# EAGLE board Analog_Scaling_Circuit_Manual (EAGLE 9.3.0)
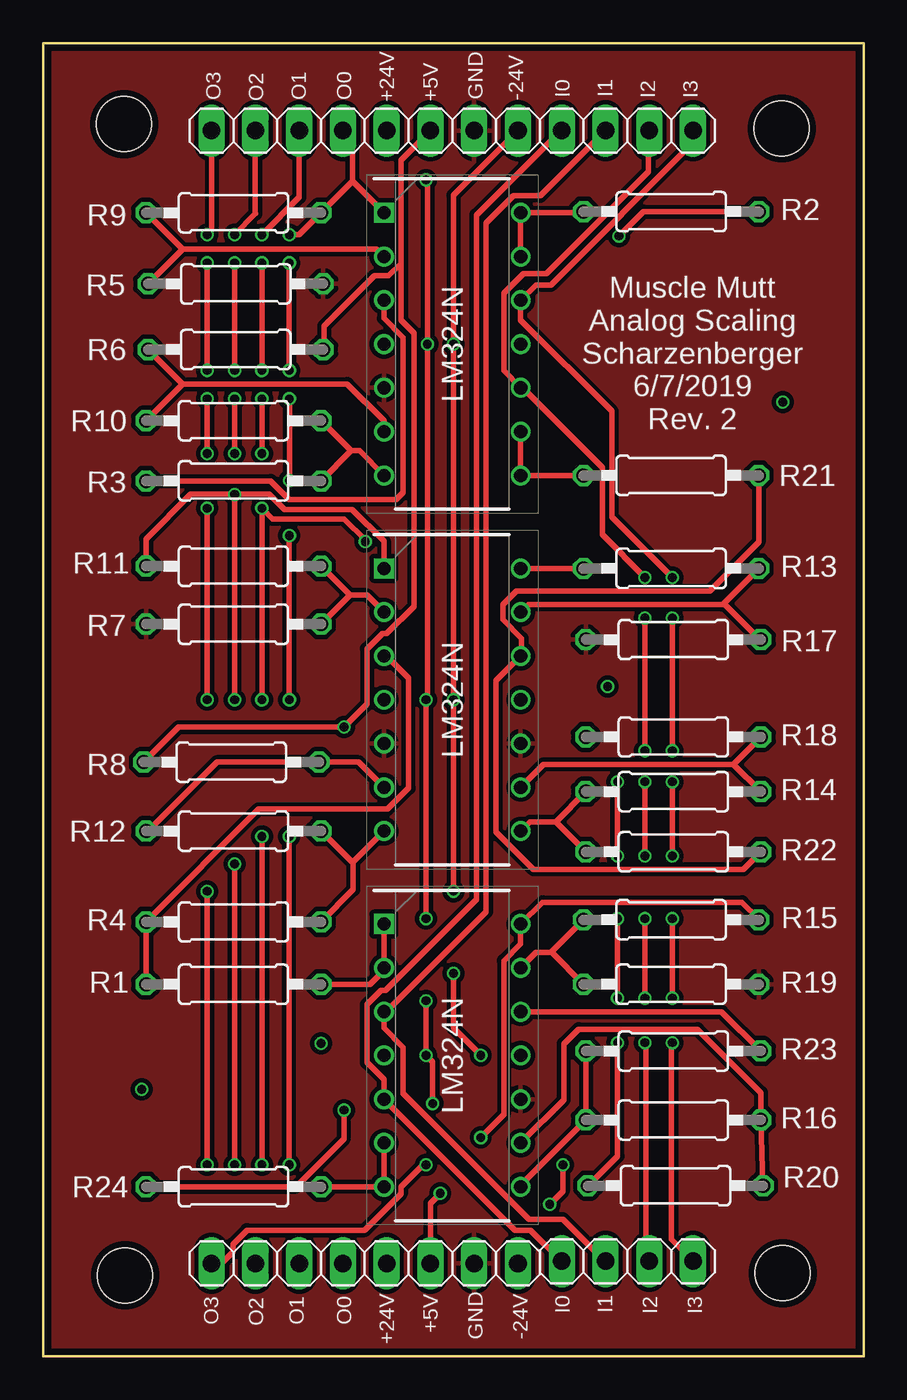
[diagram p0: board, top side]
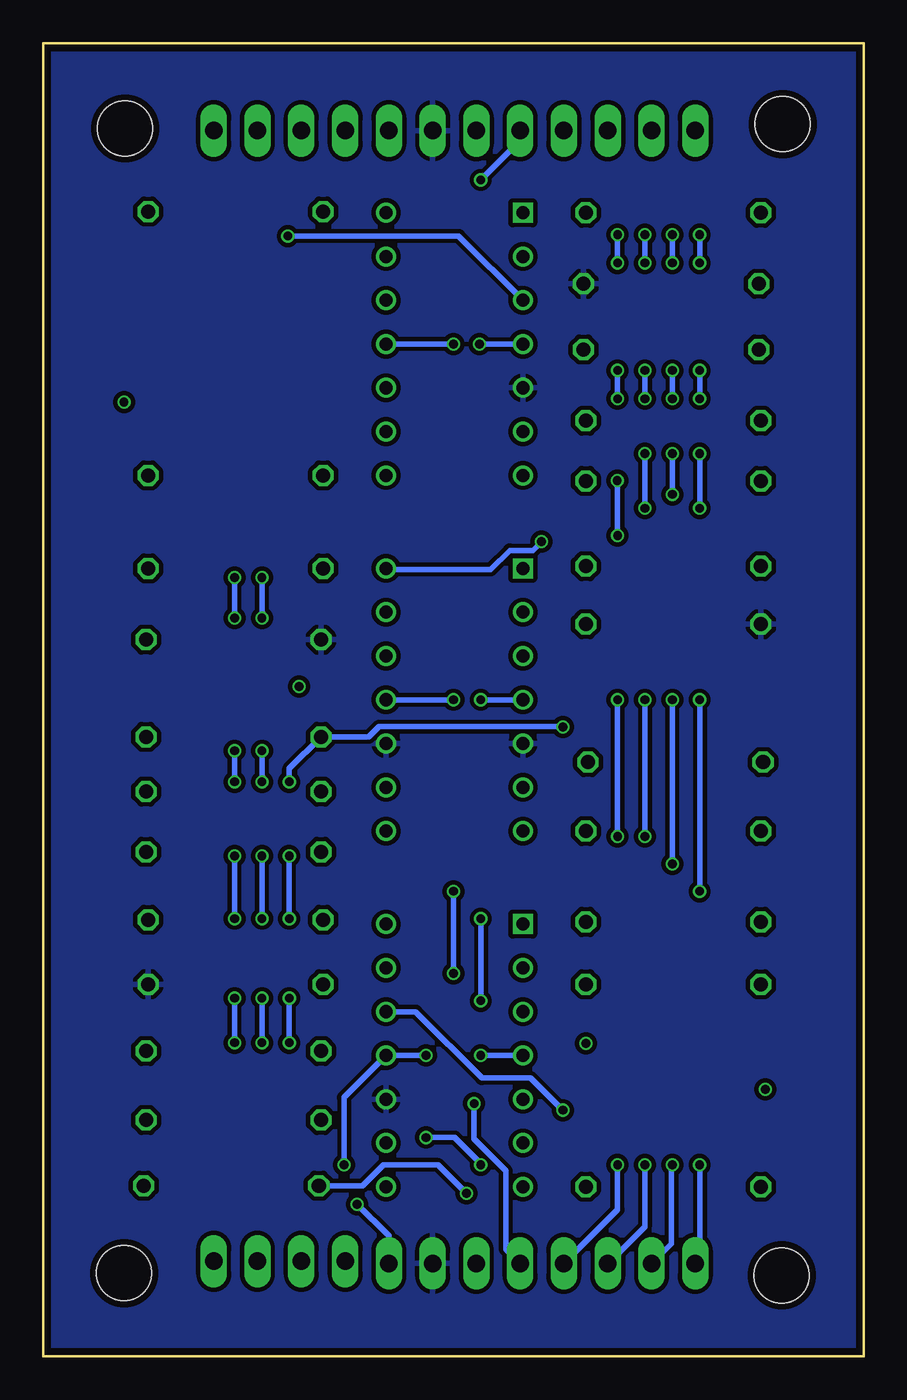
[diagram p1: board, bottom side, seen from below]

Size 47.62 x 76.2 mm. Coordinates in mm from the lower left corner, seen from the top.
Outline: 0,0 47.62,0 47.62,76.2 0,76.2 0,0
Copper layers (1*16): Top 0.035559375mm / dielectric 1.6mm / Bottom 0.035559375mm
Design rules "oshpark-2layer": minimum track width 6mil, minimum drill 10mil, track to track 6mil, track to pad 6mil, pad to pad 6mil, via to via 6mil, smd to smd 6mil, copper to edge 15mil, drill to drill 6mil, minimum pad ring 5mil, minimum via ring 5mil, stop-mask expansion 2.5mil, vias tented up to drill 0mil, thermal gap 10mil
Net classes: 0 default: width 0.305 mm, drill 0.508 mm, clearance 0.254 mm
Holes 3.17 mm at 4.76,4.7 42.93,4.83 4.7,71.5 42.86,71.25

## Footprints (pad centres in the part's own frame; a part is rotated, then mirrored left to right if it is on the bottom)
DIP794W56P254L1905H533Q14N = drill 0.759 pad 1.159 square: 1 -3.969,7.62 | drill 0.759 pad 1.159: 2 -3.969,5.08; 3 -3.969,2.54; 4 -3.969,0; 5 -3.969,-2.54; 6 -3.969,-5.08; 7 -3.969,-7.62; 8 3.969,-7.62; 9 3.969,-5.08; 10 3.969,-2.54; 11 3.969,0; 12 3.969,2.54; 13 3.969,5.08; 14 3.969,7.62
1X04 = drill 1.016 long: 1 -3.81,0; 2 -1.27,0; 3 1.27,0; 4 3.81,0
0207/10 = drill 0.813 octagon: 1 -5.08,0; 2 5.08,0

## Placement (x,y rotation side)
IC1  LM324N  [DIP794W56P254L1905H533Q14N]  23.75,58.74 0 top
IC2  LM324N  [DIP794W56P254L1905H533Q14N]  23.75,38.1 0 top
IC3  LM324N  [DIP794W56P254L1905H533Q14N]  23.75,17.46 0 top
JP1  [1X04]  13.59,71.12 180 top
JP2  [1X04]  23.75,71.12 180 top
JP3  [1X04]  23.75,5.4 0 top
JP4  [1X04]  33.91,71.12 0 top
JP5  [1X04]  13.59,5.4 180 top
JP6  [1X04]  33.91,5.52 0 top
R1  3.3 kO  [0207/10]  11.05,21.59 0 top
R2  3.3 kO  [0207/10]  36.45,66.42 180 top
R3  4.7 kO  [0207/10]  11.05,50.8 180 top
R4  4.7 kO  [0207/10]  11.05,25.21 180 top
R5  3.3 kO  [0207/10]  11.18,62.23 0 top
R6  33 kO  [0207/10]  11.18,58.42 0 top
R7  3.3 kO  [0207/10]  11.05,42.48 180 top
R8  33 kO  [0207/10]  10.92,34.48 180 top
R9  4.7 kO  [0207/10]  11.05,66.36 180 top
R10  5.6 kO  [0207/10]  11.05,54.29 0 top
R11  4.7 kO  [0207/10]  11.05,45.85 0 top
R12  5.6 kO  [0207/10]  11.05,30.48 0 top
R13  4.7 kO  [0207/10]  36.45,45.72 0 top
R14  5.6 kO  [0207/10]  36.58,32.77 0 top
R15  4.7 kO  [0207/10]  36.45,25.34 180 top
R16  5.6 kO  [0207/10]  36.58,13.72 0 top
R17  3.3 kO  [0207/10]  36.58,41.59 180 top
R18  33 kO  [0207/10]  36.58,35.94 0 top
R19  3.3 kO  [0207/10]  36.45,21.59 0 top
R20  33 kO  [0207/10]  36.7,9.91 0 top
R21  3.3 kO  [0207/10]  36.45,51.12 180 top
R22  4.7 kO  [0207/10]  36.58,29.27 0 top
R23  4.7 kO  [0207/10]  36.58,17.72 0 top
R24  3.3 kO  [0207/10]  11.05,9.84 180 top

## Library data of the parts
IC1-IC3 = SamacSys_Parts; DESCRIPTION: OP Amp Quad GP 16V/32V 14-Pin PDIP Texas Instruments LM324N, Quad Op Amp, 1.2MHz, 5 28 V, 14-Pin PDIP; HEIGHT: 5.334mm; MANUFACTURER_NAME: Texas Instruments; MANUFACTURER_PART_NUMBER: LM324N; MOUSER_PART_NUMBER: 595-LM324N
JP1-JP6 = pinhead
R1-R24 = rcl; SPICEPREFIX: R

## Nets
+5V: JP2.3 JP3.2 R6.2 R8.2 R18.1 R20.1
+24V: IC1.4 IC2.4 IC3.4 JP2.4 JP3.1
-24V: IC1.11 IC2.11 IC3.11 JP2.1 JP3.4
GND: IC1.5 IC2.5 IC2.10 IC3.10 JP2.2 JP3.3 R5.2 R7.2 R17.2 R19.2
IN0: IC1.12 JP4.4 JP6.4
IN1: IC1.10 JP4.3 JP6.3
IN2: IC3.3 JP4.2 JP6.2
IN3: IC3.5 JP4.1 JP6.1
N$16: IC1.13 IC1.14 R2.2
N$17: IC1.6 R6.1 R10.1
N$18: IC1.7 R3.1 R10.2
N$19: IC1.3 R2.1 R3.2
N$20: IC1.2 R5.1 R9.2
N$23: IC2.6 R8.1 R12.1
N$24: IC2.7 R4.1 R12.2
N$25: IC2.3 R1.1 R4.2
N$26: IC2.2 R7.1 R11.2
N$29: IC1.8 IC1.9 R21.2
N$30: IC2.13 R13.2 R17.1
N$31: IC3.1 IC3.2 R1.2
N$32: IC2.12 R21.1 R22.2
N$33: IC2.9 R14.2 R18.2
N$34: IC2.8 R14.1 R22.1
N$35: IC3.13 R15.2 R19.1
N$36: IC3.12 R23.2 R24.2
N$37: IC3.9 R16.2 R20.2
N$38: IC3.8 R16.1 R23.1
N$39: IC3.6 IC3.7 R24.1
OUT0: IC1.1 JP1.1 JP5.1 R9.1
OUT1: IC2.14 JP1.2 JP5.2 R13.1
OUT2: IC2.1 JP1.3 JP5.3 R11.1
OUT3: IC3.14 JP1.4 JP5.4 R15.1

## Tracks (layer width: path | path; a pad name or v marks a point on that pad's centre or on a via)
+5V  (via drill 0.51)
  Top 0.305: JP3.2 22.48,8.89 v23.05,9.46 | R8.2 7.87,36.51 v17.46,36.51 18.79,37.84 18.79,41.05 19.69,41.94 19.94,41.94 21.51,43.52 21.51,59.38 20.77,60.13 20.77,63.41 | 20.77,63.41 20.06,62.7 19.25,62.7 16.32,59.78 16.32,58.48 R6.2 | JP2.3 20.77,69.41 20.77,63.41 | R20.1 33.34,11.62 v33.34,18.2 | v33.34,20.79 v33.34,25.4 | v33.34,29.05 v33.34,33.34
  Bottom 0.305: v23.05,9.46 24.7,11.11 27.88,11.11 29.08,9.91 R20.1 | v17.46,36.51 17.5,36.55 28.13,36.55 28.73,35.94 R18.1 33.34,34.1 v33.34,33.34 | v33.34,18.2 v33.34,20.79 | v33.34,25.4 v33.34,29.05
+24V  (via drill 0.51)
  Top 0.305: v22.23,68.26 22.3,68.19 v22.3,58.74 22.3,38.18 v22.23,38.1 v22.23,25.4 | v22.23,20.64 v22.23,17.46 22.61,17.08 v22.61,14.67
  Bottom 0.305: JP2.4 19.94,70.55 v22.23,68.26 | v22.3,58.74 IC1.4 | v22.23,38.1 IC2.4 | v22.23,25.4 v22.23,20.64 | v22.23,17.46 IC3.4 | v22.61,14.67 22.61,12.61 20.77,10.77 20.77,6.22 JP3.1
-24V  (via drill 0.51)
  Top 0.305: JP2.1 23.81,67.37 v23.81,58.74 v23.81,38.1 v23.81,26.99 | v23.81,22.23 23.81,19.05 v25.4,17.46 | v30.16,11.11 30.16,9.59 v29.4,8.83
  Bottom 0.305: v23.81,58.74 IC1.11 | v23.81,38.1 IC2.11 | v23.81,26.99 v23.81,22.23 | v25.4,17.46 IC3.11 30.16,15.02 v30.16,11.11 | v29.4,8.83 27.56,6.99 JP3.4
GND
  pour Top: -1.27,76.83 -1.27,-1.27 49.21,-1.27 49.21,76.83
  pour Bottom: -1.27,76.83 -1.27,-1.27 49.21,-1.27 49.21,76.83
IN0  (via drill 0.51)
  Top 0.305: JP4.4 37.72,70.42 29.46,62.17 28.61,62.17 IC1.12 27.72,60.13 33.01,54.84 33.01,48.7 v36.51,45.2 | JP6.4 36.45,6.79 36.45,18.14 v36.51,18.2 | v36.51,20.79 v36.51,25.4 | v36.51,29.05 v36.51,33.34 | v36.51,35.14 v36.51,42.84
  Bottom 0.305: v36.51,18.2 v36.51,20.79 | v36.51,25.4 v36.51,29.05 | v36.51,33.34 v36.51,35.14 | v36.51,42.84 v36.51,45.2
IN1  (via drill 0.51)
  Top 0.305: JP4.3 35.12,71.06 35.12,68.73 29.22,62.83 27.88,62.83 26.73,61.69 26.73,57.18 IC1.10 27.8,56.12 27.89,56.12 32.45,51.56 32.45,47.67 v34.92,45.2 | JP6.3 34.99,5.71 34.99,18.14 v34.92,18.2 | v34.92,20.79 v34.92,25.4 | v34.92,29.05 v34.92,33.34 | v34.92,35.14 v34.92,42.84
  Bottom 0.305: v34.92,18.2 v34.92,20.79 | v34.92,25.4 v34.92,29.05 | v34.92,33.34 v34.92,35.14 | v34.92,42.84 v34.92,45.2
IN2
  Top 0.305: JP4.2 28.86,67.34 27.31,67.34 25.7,65.74 25.7,25.8 19.9,20 IC3.3 19.78,19.05 20.89,17.94 20.89,15.28 28.2,7.97 30.16,7.97 32.61,5.52 JP6.2
IN3
  Top 0.305: JP4.1 30.04,71.12 25.15,66.22 25.15,26.51 19.87,21.24 19.62,21.24 18.79,20.41 18.79,17.05 19.78,16.07 IC3.5 27.38,7.33 28.3,7.33 JP6.1
N$1  (via drill 0.51)
  other vias: 42.93,55.37
N$2  (via drill 0.51)
  other vias: 5.71,15.49
N$3  (via drill 0.51)
  other vias: 32.77,38.86
N$4  (via drill 0.51)
  other vias: 16.13,18.16
N$16
  Top 0.305: R2.2 31.3,66.36 IC1.14 IC1.13
N$17
  Top 0.305: IC1.6 19.78,54.29 17.65,56.42 8.1,56.42 | R6.1 8.1,56.42 | R10.1 8.1,56.42
N$18
  Top 0.305: R10.2 17.88,52.55 | 17.88,52.55 R3.1 | IC1.7 18.35,52.55 17.88,52.55
N$19  (via drill 0.51)
  Top 0.305: IC1.3 19.78,60.23 20.89,59.12 20.89,50.12 20.49,49.72 14.29,49.72 13.21,50.8 R3.2 | v33.42,65.01 34.83,66.42 R2.1
  Bottom 0.305: IC1.3 23.51,65.01 v33.42,65.01
N$20
  Top 0.305: IC1.2 19.36,64.23 8.1,64.23 | R9.2 8.1,64.23 | 8.1,64.23 R5.1
N$23
  Top 0.305: R12.1 6.1,30.48 10.1,34.48 R8.1 18.32,34.48 IC2.6
N$24
  Top 0.305: R12.2 17.95,28.65 | 17.95,28.65 18,28.61 18,27.08 R4.1 | 17.95,28.65 IC2.7
N$25
  Top 0.305: R1.1 R4.2 12.51,31.75 19.98,31.75 21.21,32.98 21.21,39.37 19.94,40.64 IC2.3
N$26
  Top 0.305: 17.81,44.16 R11.2 | R7.1 17.81,44.16 | IC2.2 18.8,44.16 17.81,44.16
N$29
  Top 0.305: R21.2 IC1.8 IC1.9
N$30
  Top 0.305: IC2.13 28.16,43.62 39.43,43.62 39.5,43.69 | 39.5,43.69 R13.2 | 39.5,43.69 41.59,41.59 R17.1
N$31
  Top 0.305: R1.2 18.99,21.59 19.78,22.38 IC3.1 IC3.2
N$32
  Top 0.305: R21.1 41.53,47.26 38.68,44.41 27.48,44.41 26.68,43.61 26.68,42.75 27.77,41.66 27.77,40.69 IC2.12 26.29,39.21 26.29,30.44 28.47,28.26 40.64,28.26 R22.2
N$33
  Top 0.305: IC2.9 29.05,34.35 40.07,34.35 | R18.2 40.07,34.35 | 40.07,34.35 R14.2
N$34
  Top 0.305: R14.1 29.75,31.02 | 29.75,31.02 R22.1 | 29.75,31.02 28.26,31.02 IC2.8
N$35
  Top 0.305: R15.2 29.5,23.46 29.53,23.43 | 29.53,23.43 R19.1 | 29.53,23.43 28.61,23.43 IC3.13
N$36  (via drill 0.51)
  Top 0.305: IC3.12 39.37,20 R23.2 | R24.2 14.67,9.84 17.46,12.64 v17.46,14.29
  Bottom 0.305: IC3.12 26,20 22.16,16.16 19.33,16.16 v17.46,14.29
N$37
  Top 0.305: R20.2 R16.2 41.66,15.3 37.97,18.99 31.07,18.99 30.23,18.14 30.23,14.89 IC3.9
N$38
  Top 0.305: IC3.8 27.72,9.94 R16.1 R23.1
N$39
  Top 0.305: R24.1 IC3.7 IC3.6
OUT0  (via drill 0.51)
  Top 0.305: 17.95,68.18 R9.1 14.86,65.09 v14.29,65.09 | 17.95,68.18 IC1.1 | 17.95,68.18 17.95,70.56 JP1.1 | v14.29,63.44 v14.29,57.21 | v14.29,55.56 14.3,55.55 v14.3,50.82 | v14.29,47.62 v14.29,38.1 | v14.29,11.11 v14.29,30.16
  Bottom 0.305: v14.29,65.09 v14.29,63.44 | v14.29,57.21 v14.29,55.56 | v14.3,50.82 14.3,47.64 v14.29,47.62 | v14.29,38.1 v14.29,30.16 | JP5.1 14.29,8.51 v14.29,11.11
OUT1  (via drill 0.51)
  Top 0.305: IC2.14 R13.1 | JP1.2 14.86,67.25 v12.7,65.09 | v12.7,63.44 v12.7,57.21 | v12.7,55.56 v12.7,52.39 | v18.7,47.27 18.7,47.35 17.46,48.59 13.32,48.59 v12.7,49.21 v12.7,38.1 | v12.7,30.16 v12.7,11.11
  Bottom 0.305: v12.7,57.21 v12.7,55.56 | v12.7,65.09 v12.7,63.44 | IC2.14 27.65,45.66 21.65,45.66 20.54,46.77 19.21,46.77 v18.7,47.27 | v12.7,52.39 v12.7,49.21 | v12.7,38.1 v12.7,30.16 | v12.7,11.11 12.71,11.1 12.71,7.52 14.83,5.4 JP5.2
OUT2  (via drill 0.51)
  Top 0.305: IC2.1 19.78,47.31 17.94,49.15 14,49.15 13.11,50.04 11.09,50.04 | JP1.3 12.32,66.29 v11.11,65.09 | v11.11,63.44 v11.11,57.21 | v11.11,55.56 v11.11,52.39 | 11.09,50.04 v11.11,50.01 v11.11,38.1 | 11.09,50.04 8.57,50.04 5.97,47.43 R11.1 | v11.11,11.11 v11.11,28.57
  Bottom 0.305: v11.11,57.21 v11.11,55.56 | v11.11,65.09 v11.11,63.44 | v11.11,52.39 v11.11,50.01 | JP5.3 11.18,6.54 11.18,11.05 v11.11,11.11 | v11.11,28.57 v11.11,38.1
OUT3  (via drill 0.51)
  Top 0.305: R15.1 41.53,25.38 40.55,26.35 28.98,26.35 27.72,25.09 IC3.14 27.72,23.94 26.73,22.95 26.73,14.03 v25.4,12.7 | v22.23,11.11 22.04,11.11 20.77,9.84 20.77,9.43 18.66,7.33 11.84,7.33 11.02,6.52 11.02,6.07 10.35,5.4 JP5.4 | JP1.4 9.78,65.34 v9.53,65.09 | v9.53,63.44 v9.53,57.21 | v9.53,55.56 v9.53,52.39 | v9.53,49.21 v9.53,38.1 | v9.53,26.99 v9.53,11.11
  Bottom 0.305: v25.4,12.7 23.75,12.7 22.23,11.18 v22.23,11.11 | v9.53,65.09 v9.53,63.44 | v9.53,57.21 v9.53,55.56 | v9.53,52.39 v9.53,49.21 | v9.53,38.1 v9.53,26.99 | v9.53,11.11 9.53,5.65 JP5.4

## Text on the board
tPlace: O3 | O2 | O1 | O0 | +24V | +5V | GND | -24V | I0 | I1 | I2 | I3 | Muscle Mutt / Analog Scaling / Scharzenberger / 6/7/2019 / Rev. 2 | O3 | O2 | O1 | O0 | +5V | I0 | I1 | I2 | I3 | +24V | GND | -24V